# Altium PCB MiniMax 4bit.pcbdoc (part 2 of 3)
Units mil, origin at the board's own origin, x right, y up, seen from the top; angles counter-clockwise.
Board outline 6151.56 x 5816.92 mil, 2 copper layers (Top Layer, Bottom Layer); 181 components, 187 nets, 727 pads, 463 vias.
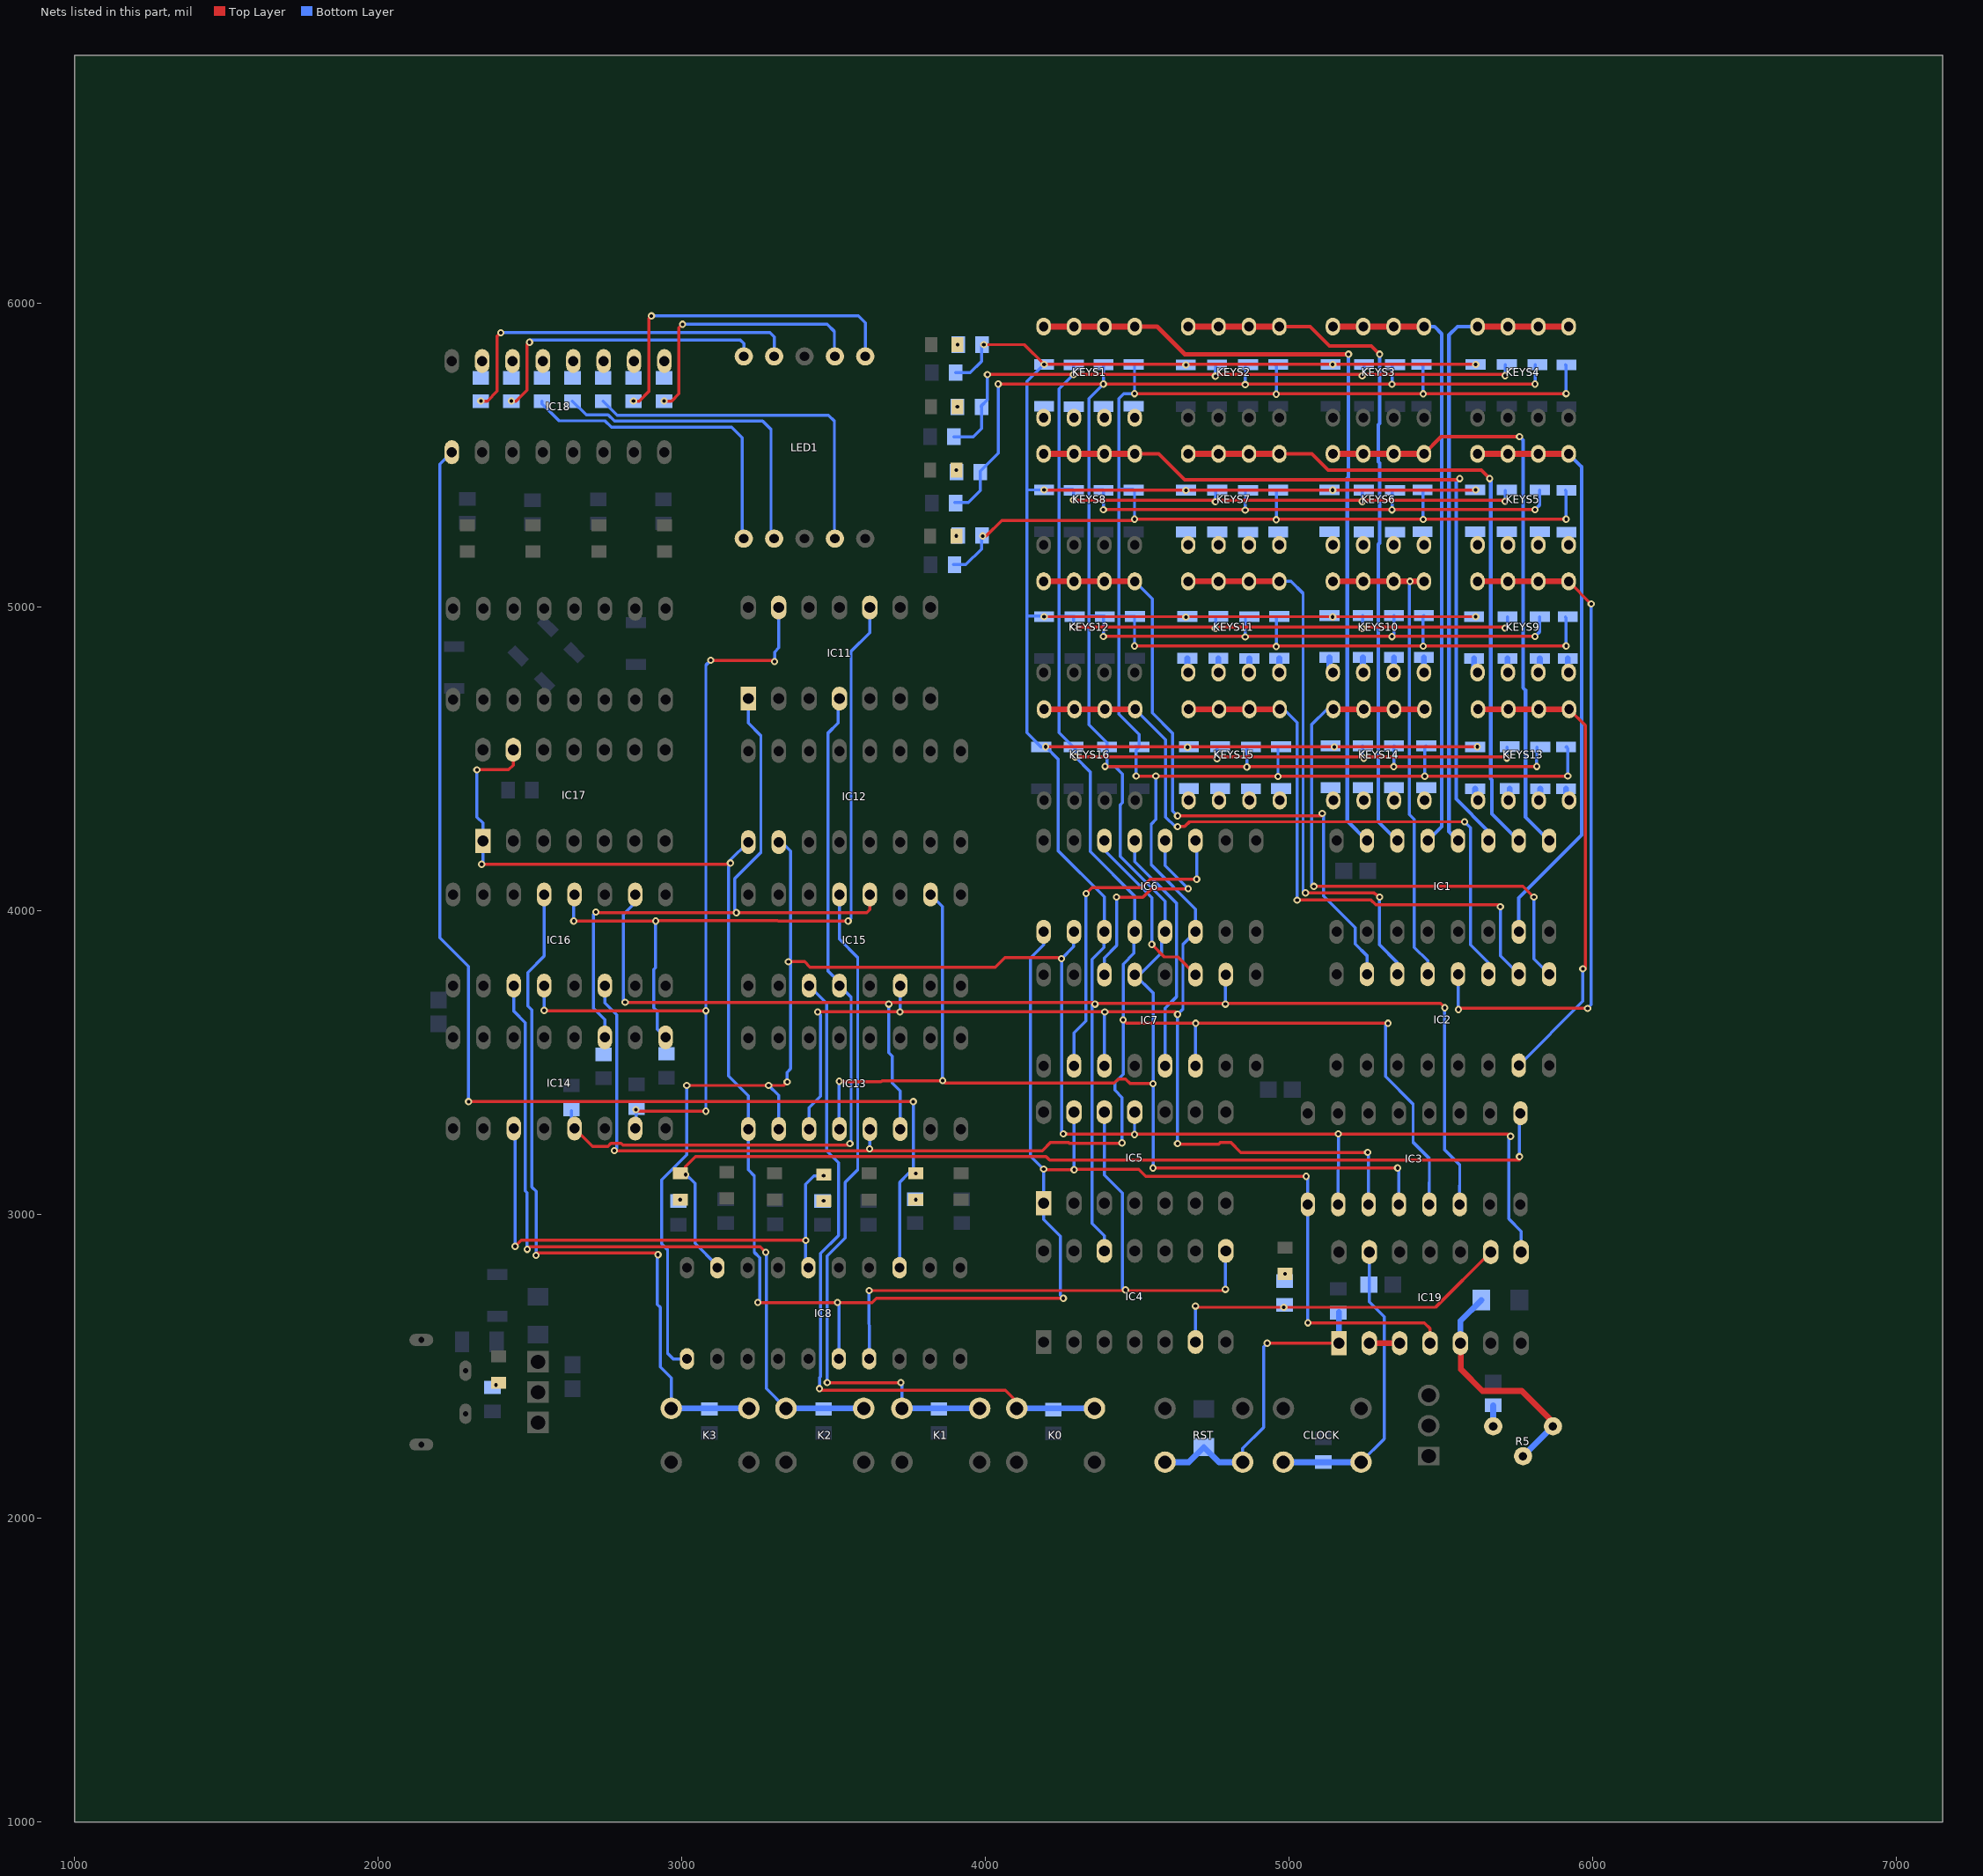
[diagram p2: the nets of this part, all layers, seen from the top]

## Via types
v1: diameter 24, hole 12, Top Layer to Bottom Layer, tented both sides, 306 vias
v2: diameter 27.56, hole 15.75, Top Layer to Bottom Layer, tented both sides, 98 vias
v3: diameter 31.5, hole 15.75, Top Layer to Bottom Layer, tented both sides, 59 vias

## Nets (pads, with @x,y where several pads share a name; then routed paths per layer and width w, separated by ;. In a path a pad name is that pad's centre, name@x,y a point inside that pad or via, vN(x,y) a via of type N, cw(c..) or ccw(c..) an arc to the next point about the centre after c; other vN are vias at no path point) (continued)
IC19_1: C2.2 IC19.1 R8.1 RST.1 RST.2 | length 1060.7
  Top Layer w10: v1(4927.17,2576.81) IC19.1@5163.38,2576.77
  Bottom Layer w10: RST.2@4846.5,2185.02 4846.47,2230.31 4915.37,2299.21 4915.37,2565.01 v1(4927.17,2576.81)
  Bottom Layer w19.68: RST.1@4590.5,2185.02 4668.97,2185.01 C2.2@4718.5,2234.55 4768.07,2185.01 RST.2@4846.5,2185.02 ; IC19.1@5163.38,2576.77 R8.1@5163.37,2679.11
IC19_2: IC19.2 IC19.3 | length 100
  Top Layer w19.68: IC19.2@5263.38,2576.77 IC19.3@5363.38,2576.77
IC19_9: IC4.6 IC19.9 R42.1 | length 1167.5
  Top Layer w10: v1(4690.97,2698.81) 4694.87,2694.91 v1(4981.89,2694.91) ; v1(4981.89,2694.91) 5481.47,2694.91 IC19.9@5663.38,2876.77
  Bottom Layer w10: IC4.6@4690.97,2580.71 v1(4690.97,2698.81)
IC19_13: C1.1 CLOCK.1 CLOCK.2 IC19.13 R9.1 | length 1000.1
  Bottom Layer w10: CLOCK.2@5236.26,2185.02 5312.97,2261.71 5312.97,2663.41 5263.37,2713.01 IC19.13@5263.38,2876.77
  Bottom Layer w19.68: CLOCK.1@4980.26,2185.02 CLOCK.2@5236.26,2185.02
IN0: IC15.3 K0.3 K0.4 R25.2 | length 2338.2
  Top Layer w10: v1(3452.77,2427.21) 3458.77,2421.21 4064.97,2421.21 4102.27,2383.91 K0.4@4102.31,2362.22
  Bottom Layer w10: IC15.3@3418.5,3753.93 3476.37,3696.01 3476.37,3210.61 3515.77,3171.21 3515.77,2931.11 3456.67,2872.01 3456.67,2466.51 3452.77,2462.61 v1(3452.77,2427.21)
  Bottom Layer w19.68: K0.4@4102.31,2362.22 K0.3@4358.31,2362.22
IN1: IC15.13 K1.3 K1.4 R24.2 | length 2258
  Top Layer w10: v1(3478.37,2446.81) v1(3720.47,2446.81)
  Bottom Layer w10: v1(3478.37,2446.81) 3478.37,2864.21 3537.37,2923.21 3537.37,3106.31 3578.77,3147.71 3578.77,3846.41 3518.47,3906.71 IC15.13@3518.5,4053.93 ; v1(3720.47,2446.81) 3724.36,2442.92 K1.4@3724.36,2362.22
  Bottom Layer w19.68: K1.4@3724.36,2362.22 K1.3@3980.36,2362.22
IN2: IC16.3 K2.3 K2.4 R23.2 | length 2479.5
  Top Layer w10: v1(2490.16,2885.82) 2498.03,2893.7 3257.88,2893.7 v1(3275.59,2875.98)
  Bottom Layer w10: IC16.3@2446.06,3753.93 2446.87,3669.31 2484.27,3631.91 2484.27,3078.71 2490.17,3072.81 v1(2490.16,2885.82) ; v1(3275.59,2875.98) 3277.56,2874.02 3277.56,2427.12 K2.4@3342.47,2362.22
  Bottom Layer w19.68: K2.4@3342.47,2362.22 K2.3@3598.47,2362.22
IN3: IC16.13 K3.3 K3.4 R22.2 | length 2418.3
  Top Layer w10: v1(2519.68,2866.14) 2519.67,2874.01 2921.27,2874.01 v1(2921.26,2868.11)
  Bottom Layer w10: v1(2519.68,2866.14) 2519.67,3076.81 2505.87,3090.51 2505.87,3673.21 2492.17,3687.01 2492.17,3797.21 2546.07,3851.21 IC16.13@2546.06,4053.93 ; v1(2921.26,2868.11) 2919.27,2866.11 2919.27,2704.71 2929.17,2694.91 2929.17,2498.01 2964.47,2462.61 K3.4@2964.52,2362.22
  Bottom Layer w19.68: K3.4@2964.52,2362.22 K3.3@3220.52,2362.22
KEYS1_1: D1.1 KEYS1.1
KEYS1_2: D2.1 KEYS1.2
KEYS1_3: D3.1 KEYS1.3
KEYS1_4: D4.1 KEYS1.4
KEYS1_8: IC1.15 KEYS1.5 KEYS1.6 KEYS1.7 KEYS1.8 | length 2676.9
  Top Layer w14.05: KEYS1.5@4491.08,5923.61 4564.57,5923.61 4655.47,5832.71 v1(5194.87,5832.71)
  Top Layer w19.68: KEYS1.8@4191.08,5923.61 KEYS1.5@4491.08,5923.61
  Bottom Layer w12.01: v1@5190.97,5836.61 v1(5194.87,5832.71) 5194.87,5427.11 5190.97,5423.21 5190.97,4295.61 IC1.15@5255.51,4231.1
KEYS2_8: IC1.14 KEYS2.5 KEYS2.6 KEYS2.7 KEYS2.8 | length 2300.3
  Top Layer w12.01: KEYS2.5@4966.97,5923.61 5068.47,5923.61 5131.87,5860.21 5269.67,5860.21 v1@5297.27,5832.71
  Top Layer w19.68: KEYS2.8@4666.97,5923.61 KEYS2.5@4966.97,5923.61
  Bottom Layer w12.01: v1@5297.27,5832.71 5297.27,5604.31 5293.27,5600.41 5293.27,5478.31 5297.27,5474.41 5297.27,5210.61 5293.27,5206.71 5293.27,4293.31 IC1.14@5355.5,4231.1
  other v1: 5297.24,5832.67
KEYS3_8: IC1.13 KEYS3.5 KEYS3.6 KEYS3.7 KEYS3.8 | length 2056.4
  Top Layer w19.68: KEYS3.8@5143.3,5923.61 KEYS3.5@5443.3,5923.61
  Bottom Layer w12.01: KEYS3.5@5443.3,5923.61 5477.97,5923.61 5501.97,5899.61 5501.97,4277.51 IC1.13@5455.5,4231.1
KEYS4_8: IC1.12 KEYS4.5 KEYS4.6 KEYS4.7 KEYS4.8 | length 2082.6
  Top Layer w19.68: KEYS4.8@5619.67,5923.61 KEYS4.5@5919.67,5923.61
  Bottom Layer w12.01: IC1.12@5555.5,4231.1 5525.57,4261.01 5525.57,5895.61 5553.57,5923.61 KEYS4.8@5619.67,5923.61
KEYS5_1: D17.1 KEYS5.1
KEYS5_2: D18.1 KEYS5.2
KEYS5_3: D19.1 KEYS5.3
KEYS5_4: D20.1 KEYS5.4
KEYS5_8: IC1.7 KEYS5.5 KEYS5.6 KEYS5.7 KEYS5.8 | length 1977.2
  Top Layer w19.68: KEYS5.8@5619.67,5504.72 KEYS5.5@5919.67,5504.72
  Bottom Layer w12.01: IC1.7@5755.5,3931.1 5755.47,4042.91 5962.57,4250.01 5962.57,5461.81 KEYS5.5@5919.67,5504.72
KEYS6_1: D21.1 KEYS6.1
KEYS6_2: D22.1 KEYS6.2
KEYS6_3: D23.1 KEYS6.3
KEYS6_4: D24.1 KEYS6.4
KEYS6_8: IC1.9 KEYS6.5 KEYS6.6 KEYS6.7 KEYS6.8 | length 2008.2
  Top Layer w12.01: KEYS6.5@5443.3,5504.72 5499.57,5561.01 v1(5757.87,5561.01)
  Top Layer w19.68: KEYS6.8@5143.3,5504.72 KEYS6.5@5443.3,5504.72
  Bottom Layer w12.01: v1(5757.87,5561.01) 5769.67,5549.21 5769.67,4734.31 5777.57,4726.41 5777.57,4309.01 IC1.9@5855.5,4231.1
KEYS7_1: D25.1 KEYS7.1
KEYS7_2: D26.1 KEYS7.2
KEYS7_3: D27.1 KEYS7.3
KEYS7_4: D28.1 KEYS7.4
KEYS7_8: IC1.10 KEYS7.5 KEYS7.6 KEYS7.7 KEYS7.8 | length 2258.1
  Top Layer w12.01: KEYS7.5@4966.97,5504.71 5073.97,5504.71 5127.97,5450.81 5631.87,5450.81 v1@5659.47,5423.21
  Top Layer w19.68: KEYS7.8@4666.97,5504.71 KEYS7.5@4966.97,5504.71
  Bottom Layer w12.01: v1@5659.47,5423.21 5663.37,5419.31 5663.37,4435.01 5667.27,4431.11 5667.27,4319.31 IC1.10@5755.5,4231.1
  other v1: 5659.44,5423.22
KEYS8_8: IC1.11 KEYS8.5 KEYS8.6 KEYS8.7 KEYS8.8 | length 2647.9
  Top Layer w12.01: KEYS8.5@4491.08,5504.72 4570.07,5504.71 4655.47,5419.31 5557.07,5419.31 v1(5561.02,5423.22)
  Top Layer w19.68: KEYS8.8@4191.08,5504.72 KEYS8.5@4491.08,5504.72
  Bottom Layer w12.01: v1(5561.02,5423.22) 5549.17,5411.41 5549.17,4368.11 5655.47,4261.81 IC1.11@5655.5,4231.1
KEYS9_1: D33.1 KEYS9.1 | length 50.5
  Bottom Layer w19.68: D33.1@5608.26,4830.7 5608.27,4796.31 KEYS9.1@5619.67,4784.87
KEYS9_2: D34.1 KEYS9.2 | length 46.3
  Bottom Layer w19.68: D34.1@5718.49,4830.7 5718.47,4786.01 KEYS9.2@5719.67,4784.87
KEYS9_3: D35.1 KEYS9.3 | length 47.9
  Bottom Layer w19.68: KEYS9.3@5819.67,4784.87 5824.77,4790.01 D35.1@5824.79,4830.7
KEYS9_4: D36.1 KEYS9.4 | length 47
  Bottom Layer w19.68: D36.1@5916.8,4830.68 5916.77,4787.71 KEYS9.4@5919.67,4784.87
KEYS9_8: IC2.12 KEYS9.5 KEYS9.6 KEYS9.7 KEYS9.8 | length 2285.1
  Top Layer w10: v1(5557.08,3675.19) 5561.02,3679.13 v1(5982.27,3679.13) ; KEYS9.5@5919.67,5084.87 v1@5994.07,5010.41
  Top Layer w19.68: KEYS9.8@5619.67,5084.87 KEYS9.5@5919.67,5084.87
  Bottom Layer w10: IC2.12@5555.5,3791.28 5555.47,3676.71 v1(5557.08,3675.19) ; v1(5982.27,3679.13) 5994.07,3690.93 v1@5994.07,5010.41
  other v1: 5994.08,5010.45
KEYS10_1: D37.1 KEYS10.1 | length 54.4
  Bottom Layer w19.68: D37.1@5131.88,4834.64 5131.87,4796.31 KEYS10.1@5143.3,4784.87
KEYS10_2: D38.1 KEYS10.2 | length 50.2
  Bottom Layer w19.68: D38.1@5242.17,4834.61 5242.17,4786.01 KEYS10.2@5243.3,4784.87
KEYS10_3: D39.1 KEYS10.3 | length 50.2
  Bottom Layer w19.68: KEYS10.3@5343.3,4784.87 5344.47,4786.01 D39.1@5344.48,4834.64
KEYS10_4: D40.1 KEYS10.4 | length 49.9
  Bottom Layer w19.68: D40.1@5442.9,4834.64 5442.87,4785.31 KEYS10.4@5443.3,4784.87
KEYS10_8: IC2.13 KEYS10.5 KEYS10.6 KEYS10.7 KEYS10.8 | length 1663.5
  Top Layer w19.68: KEYS10.8@5143.3,5084.87 5397.67,5084.91 KEYS10.5@5443.3,5084.87
  Bottom Layer w10: KEYS10.5@5443.3,5084.87 5399.87,5084.91 5395.67,5080.71 5395.67,4903.51 5395.67,4316.91 5411.37,4301.21 5411.37,3879.91 5455.47,3835.81 IC2.13@5455.5,3791.28
  other v1: 5397.65,5084.87
KEYS11_1: D41.1 KEYS11.1 | length 47.8
  Bottom Layer w19.68: D41.1@4664.08,4831.52 4664.07,4787.71 KEYS11.1@4666.97,4784.91
KEYS11_2: D42.1 KEYS11.2 | length 46.6
  Bottom Layer w19.68: D42.1@4766.47,4831.51 KEYS11.2@4766.97,4784.91
KEYS11_3: D43.1 KEYS11.3 | length 46.5
  Bottom Layer w19.68: KEYS11.3@4866.97,4784.91 4868.07,4786.11 D43.1@4868.11,4831
KEYS11_4: D44.1 KEYS11.4 | length 46.6
  Bottom Layer w19.68: KEYS11.4@4966.97,4784.91 D44.1@4967.27,4831.51
KEYS11_8: IC2.14 KEYS11.5 KEYS11.6 KEYS11.7 KEYS11.8 | length 1915.7
  Top Layer w10: v1@5053.17,4059.01 5279.07,4059.01 v1@5297.27,4045.31
  Top Layer w19.68: KEYS11.8@4666.97,5084.91 KEYS11.5@4966.97,5084.91
  Bottom Layer w10: KEYS11.5@4966.97,5084.91 5005.67,5084.91 5045.27,5045.31 5045.27,4059.01 v1@5053.17,4059.01 ; v1@5297.27,4045.31 5297.27,3887.71 5355.47,3829.51 IC2.14@5355.5,3791.28
  other v1: 5297.24,4045.27 5053.14,4059.05
KEYS12_8: IC2.15 KEYS12.5 KEYS12.6 KEYS12.7 KEYS12.8 | length 2207.3
  Top Layer w10: v1(4631.87,4313.01) 5108.26,4313.01 v1(5108.26,4320.86)
  Top Layer w19.68: KEYS12.8@4191.08,5084.87 KEYS12.5@4491.08,5084.87
  Bottom Layer w10: KEYS12.5@4491.08,5084.87 4549.17,5026.71 4549.17,4651.61 4616.17,4584.61 4616.17,4328.71 v1(4631.87,4313.01) ; v1(5108.26,4320.86) 5112.17,4320.91 5112.17,4049.21 5216.57,3944.91 5216.57,3891.71 5255.47,3852.81 IC2.15@5255.51,3791.28
KEYS13_1: D49.1 KEYS13.1 | length 41.6
  Bottom Layer w19.68: D49.1@5612.2,4401.57 5612.17,4372.71 KEYS13.1@5621.17,4363.71
KEYS13_2: D50.1 KEYS13.2 | length 40.5
  Bottom Layer w19.68: KEYS13.2@5721.17,4363.71 5725.37,4367.91 D50.1@5725.37,4402.51
KEYS13_3: D51.1 KEYS13.3 | length 40.4
  Bottom Layer w19.68: KEYS13.3@5821.17,4363.71 5826.27,4368.91 D51.1@5826.26,4402.01
KEYS13_4: D52.1 KEYS13.4 | length 42
  Bottom Layer w19.68: D52.1@5911.41,4401.57 5911.37,4373.41 KEYS13.4@5921.17,4363.71
KEYS13_8: IC2.7 KEYS13.5 KEYS13.6 KEYS13.7 KEYS13.8 | length 1589.7
  Top Layer w10: KEYS13.5@5921.17,4663.71 5974.37,4610.51 5974.37,3809.01 v1@5966.57,3809.01
  Top Layer w19.68: KEYS13.8@5621.17,4663.71 KEYS13.5@5921.17,4663.71
  Bottom Layer w10: IC2.7@5755.5,3491.28 5966.57,3702.41 v1@5966.57,3809.01
  other v1: 5966.53,3809.05
KEYS14_1: D53.1 KEYS14.1
KEYS14_2: D54.1 KEYS14.2
KEYS14_3: D55.1 KEYS14.3
KEYS14_4: D56.1 KEYS14.4
KEYS14_8: IC2.9 KEYS14.5 KEYS14.6 KEYS14.7 KEYS14.8 | length 1941.9
  Top Layer w10: v1(5080.7,4080.7) 5769.67,4080.71 v1(5805.11,4045.27)
  Top Layer w19.68: KEYS14.8@5144.75,4663.74 KEYS14.5@5444.75,4663.74
  Bottom Layer w10: v1(5080.7,4080.7) 5072.87,4088.61 5072.87,4612.21 5124.37,4663.71 KEYS14.8@5144.75,4663.74 ; v1(5805.11,4045.27) 5805.07,3841.71 IC2.9@5855.5,3791.28
KEYS15_1: D57.1 KEYS15.1
KEYS15_2: D58.1 KEYS15.2
KEYS15_3: D59.1 KEYS15.3
KEYS15_4: D60.1 KEYS15.4
KEYS15_8: IC2.10 KEYS15.5 KEYS15.6 KEYS15.7 KEYS15.8 | length 1889.2
  Top Layer w10: v1(5025.58,4035.43) 5269.67,4035.41 5285.47,4019.71 5694.87,4019.71 v1(5694.87,4013.77)
  Top Layer w19.68: KEYS15.8@4668.37,4663.74 KEYS15.5@4968.37,4663.74
  Bottom Layer w10: KEYS15.5@4968.37,4663.74 4981.87,4663.71 5025.57,4620.01 v1(5025.58,4035.43) ; v1(5694.87,4013.77) 5694.87,3851.91 IC2.10@5755.5,3791.28
KEYS16_8: IC2.11 KEYS16.5 KEYS16.6 KEYS16.7 KEYS16.8 | length 2234.5
  Top Layer w10: v1(4631.87,4277.51) 4655.47,4277.51 4671.27,4293.31 v1(5576.76,4293.3)
  Top Layer w19.68: KEYS16.8@4192.57,4663.71 KEYS16.5@4492.57,4663.71
  Bottom Layer w10: KEYS16.5@4492.57,4663.71 4592.47,4563.71 4592.47,4309.01 4623.97,4277.51 v1(4631.87,4277.51) ; v1(5576.76,4293.3) 5596.47,4273.61 5596.47,3887.81 5655.47,3828.71 IC2.11@5655.5,3791.28
MCLK: IC3.2 IC5.11 IC6.2 IC8.1 IC12.2 IC13.2 IC19.8 | length 6106
  Top Layer w10: v1@3015.74,3425.19 v1(3285.43,3425.19) 3334.64,3425.19 v1@3346.45,3437.01 ; v1(3350.37,3832.71) 3403.57,3832.71 3421.27,3814.91 4031.47,3814.91 4062.97,3846.41 4249.97,3846.41 v1(4249.99,3842.51) ; v1(4255.9,3265.74) 5720.47,3265.74 v1(5728.34,3257.87)
  Bottom Layer w10: v1(3015.75,3425.19) 3015.77,3196.81 2933.07,3114.21 2933.07,2903.51 2952.77,2883.81 2952.77,2543.31 2970.87,2525.21 IC8.1@3016.57,2525.21 ; v1@3285.47,3425.21 3318.47,3392.11 IC13.2@3318.5,3281.49 ; IC12.2@3318.5,4226.37 3328.77,4226.41 3358.27,4196.81 3358.27,3480.31 3346.47,3468.51 v1@3346.47,3437.01 ; v1(3350.37,3832.71) v1@3358.27,3832.11 ; v1(4249.99,3842.51) 4289.37,3881.91 4289.37,3929.51 IC6.2@4290.97,3931.11 ; v1(4249.99,3842.51) 4249.99,3271.65 v1(4255.9,3265.74) v1@4255.9,3263.78 ; v1(4490.17,3263.81) IC5.11@4490.97,3337.41 ; IC3.2@5161.02,3033.46 v1(5161.37,3265.71) ; v1@5728.37,3257.91 5722.47,3252.01 5722.47,2986.21 5763.37,2945.31 IC19.8@5763.38,2876.77
  other v1: 3346.45,3437
OUT: IC8.13 IC18.1 OUT.2 | length 4243.8
  Top Layer w10: v1(2297.24,3372.04) v1(3761.81,3372.04)
  Bottom Layer w10: IC18.1@2242.17,5509.81 2202.77,5470.41 2202.77,3911.41 2297.27,3816.91 v1@2297.27,3372.01 ; IC8.13@3716.57,2825.21 3716.57,3106.31 3745.97,3135.81 v1(3769.68,3135.82) ; v1(3761.81,3372.04) 3761.81,3143.69 v1(3769.68,3135.82)
OUT_1: OUT.1 R40.2
  other v1: 3769.68,3049.2
PC_2: PC.2 R35.2
  other v1: 2994.1,3049.21
PCLD: IC3.9 IC8.19 PC.1 | length 3297.3
  Top Layer w10: v1(3011.81,3131.88) 3011.77,3157.51 3045.27,3190.91 4198.87,3190.91 4210.67,3179.11 5757.87,3179.11 v1(5757.87,3190.94)
  Bottom Layer w10: v1(3011.81,3131.88) 3013.67,3131.91 3043.27,3102.31 3043.27,2905.51 3116.57,2832.21 IC8.19@3116.57,2825.21 ; v1(5757.87,3190.94) 5757.87,3330.31 IC3.9@5761.02,3333.46
R5_1: R5.1 R11.1 | length 68.9
  Bottom Layer w19.68: R5.1@5671.25,2303.14 R11.1@5671.25,2372.04
R5_2: C3.2 IC19.5 R5.2 R5.3 | length 785.4
  Top Layer w19.68: IC19.5@5563.38,2576.77 5564.97,2575.21 5564.97,2490.11 5635.77,2419.31 5765.77,2419.31 5868.07,2316.91 R5.3@5868.1,2303.14
  Bottom Layer w19.68: IC19.5@5563.38,2576.77 5563.37,2649.71 C3.2@5632.18,2718.5 ; R5.2@5769.67,2204.72 R5.3@5868.1,2303.14
R15_1: IC18.9 R15.1
R16_1: IC18.10 R16.1
R17_1: IC18.11 R17.1
R18_1: IC18.12 R18.1
R19_1: IC18.13 R19.1
R20_1: IC18.15 R20.1
R21_1: IC18.14 R21.1
REG0: IC11.4 IC14.5 IC15.4 R1.1 | length 2519
  Top Layer w10: IC14.5@2646.06,3283.46 2705.07,3224.41 2755.87,3224.41 2765.77,3234.21 2799.17,3234.21 2805.07,3228.31 3547.27,3228.31 v1@3553.17,3234.21
  Bottom Layer w10: R1.1@2635.87,3341.91 2635.87,3293.71 IC14.5@2646.06,3283.46 ; IC11.4@3518.5,4698.81 3513.77,4694.11 3513.77,4618.11 3480.27,4584.61 3480.27,3803.11 3518.47,3765.01 IC15.4@3518.5,3753.93 3557.07,3715.31 3557.07,3238.21 3553.17,3234.21 v1@3551.17,3234.21
  other v1: 3553.15,3234.25
REG1: IC11.1 IC14.11 IC15.12 R2.1 | length 2151.5
  Top Layer w10: v1(2716.53,3996.06) 2718.5,3994.09 v1(3179.13,3994.09) 3608.27,3994.11 3618.47,4004.31 IC15.12@3618.5,4053.93
  Bottom Layer w10: v1@2716.57,3996.01 2708.67,3988.21 2708.67,3679.11 2746.07,3641.71 IC14.11@2746.06,3583.46 ; v1@3179.17,3994.11 3173.27,3994.11 3173.27,4106.31 3259.87,4192.91 3259.87,4576.81 3218.47,4618.11 IC11.1@3218.5,4698.81
REG2: IC11.13 IC14.7 IC16.4 R3.1 | length 2797.1
  Top Layer w10: v1(2546.07,3672.42) 2547.23,3671.25 v1(3078.74,3671.25) ; v1(2848.43,3345.81) 2853.69,3340.55 v1(3078.74,3340.55) ; v1(3094.49,4824.79) 3301.18,4824.8 v1(3305.11,4820.86)
  Bottom Layer w10: v1(2546.07,3672.42) IC16.4@2546.06,3753.93 ; IC14.7@2846.06,3283.46 2848.47,3285.81 R3.1@2848.47,3345.81 ; v1(3078.74,3340.55) 3078.74,4809.05 v1(3094.49,4824.79) ; v1(3305.11,4820.86) 3305.07,4852.31 3318.87,4866.11 IC11.13@3318.5,4998.81
REG3: IC11.10 IC14.9 IC16.12 R4.1 | length 2456.8
  Top Layer w10: v1(2643.7,3966.53) v1(2913.38,3966.53) 2915.35,3968.5 3314.96,3968.5 3316.93,3966.53 v1(3547.24,3966.53)
  Bottom Layer w10: v1(2643.7,3966.53) 2643.67,4051.51 IC16.12@2646.06,4053.93 ; v1(2913.38,3966.53) 2913.37,3813.01 2907.47,3807.11 2907.47,3681.11 2919.27,3669.31 2919.27,3610.21 IC14.9@2946.06,3583.46 ; v1@3547.27,3966.51 3557.07,3976.41 3557.07,4854.31 3618.47,4915.71 IC11.10@3618.5,4998.81
REG_2: R38.2 REG.2
  other v1: 3466.54,3045.27
REGWR: IC8.16 IC14.3 REG.1 | length 1704
  Top Layer w10: v1(2450.79,2895.66) 2470.47,2915.35 v1(3407.48,2915.35)
  Bottom Layer w10: IC14.3@2446.06,3283.46 2450.77,3278.71 v1(2450.79,2895.66) ; IC8.16@3416.57,2825.21 3407.47,2834.31 3407.47,3100.41 3435.07,3127.91 v1@3466.57,3127.91
  other v1: 3466.53,3127.95
ROM0: D4.2 D5.2 D9.2 D13.2 D20.2 D24.2 D28.2 D29.2 D36.2 D40.2 D44.2 D45.2 D52.2 D56.2 D60.2 D61.2 IC3.3 IC6.6 IC7.3 IC13.3 IC15.6 R13.1 R27.2 | length 13283.2
  Top Layer w10: v1(3446.85,3667.32) 3470.47,3667.32 v1(3718.06,3667.32) v1(4392.29,3667.32) 4623.96,3667.32 v1(4631.87,3659.41) ; v1(3990.17,5234.21) 4001.97,5234.21 4053.17,5285.41 4486.17,5285.41 v1@4490.17,5289.31 ; v1@4490.15,4872.04 v1(5911.41,4872.04) ; v1@4490.15,5289.36 v1(5911.41,5289.36) ; v1@4490.15,5702.75 v1@5911.41,5702.75 ; v1(4495.54,4443.89) v1(4560.59,4443.88) v1(5916.8,4443.89) ; v1(4631.87,3234.21) 4633.8,3232.28 4767.71,3232.28 4773.62,3238.19 4807.08,3238.19 4840.55,3204.72 v1(5257.87,3204.72)
  Bottom Layer w10: IC13.3@3418.5,3281.49 3418.47,3351.51 3456.67,3389.71 3456.67,3657.51 v1@3446.87,3667.31 ; v1(3718.06,3667.32) IC15.6@3718.5,3753.93 ; R13.1@3894.37,5139.71 3935.07,5139.71 3986.17,5190.91 R27.2@3987.07,5239.01 ; IC7.3@4390.97,3490.11 4390.97,3666.01 v1(4392.29,3667.32) ; 4438.97,4970.21 D45.2@4491.6,4969.32 ; 4438.97,5387.41 4485.47,5387.41 D29.2@4487.67,5385.24 4490.17,5382.71 v1@4490.17,5289.31 ; D45.2@4487.67,4967.91 4490.17,4965.41 v1(4490.15,4872.04) ; D4.2@4487.67,5798.62 4490.17,5796.11 4490.17,5702.71 4454.67,5702.71 4438.97,5687.01 4438.97,4647.61 4505.87,4580.71 D61.2@4505.87,4539.31 ; D61.2@4493.07,4539.71 4505.47,4539.71 D61.2@4505.87,4539.31 ; v1@4495.57,4443.91 4495.57,4529.01 D61.2@4505.87,4539.31 ; v1(4560.59,4443.88) 4560.57,4300.71 4545.27,4285.41 4545.27,4151.61 4690.97,4005.91 4690.97,3931.11 4649.57,3889.71 4649.57,3677.11 v1(4631.87,3659.41) v1(4631.87,3234.21) ; D44.2@4954.67,4966.31 4957.17,4963.81 v1@4957.17,4870.51 ; D28.2@4954.67,5383.61 4957.17,5381.21 v1@4957.17,5287.81 ; D5.2@4954.67,5797.01 4957.17,5794.61 v1@4957.17,5701.21 ; D60.2@4960.07,4538.21 4962.57,4535.71 v1@4962.57,4442.31 ; v1(5257.87,3204.72) 5260.97,3201.61 IC3.3@5261.02,3033.46 ; D40.2@5438.07,4967.31 5438.07,4967.61 D40.2@5442.9,4972.44 5440.57,4970.11 v1(5440.57,4871.48) ; D24.2@5438.07,5384.71 5438.07,5384.91 D24.2@5438.97,5385.82 5440.57,5384.21 v1(5440.57,5288.8) ; D9.2@5438.07,5798.11 5436.17,5798.11 5435.07,5799.21 5440.57,5793.71 v1(5440.57,5702.19) ; D56.2@5443.47,4539.21 5446.67,4539.21 D56.2@5450.78,4543.3 5445.97,4538.51 v1(5445.96,4443.33) ; D36.2@5908.97,4967.91 5911.37,4965.41 v1(5911.41,4872.04) ; D20.2@5908.97,5385.21 5911.37,5382.71 v1@5911.37,5289.31 ; D13.2@5908.97,5798.61 5911.37,5796.11 v1@5911.37,5702.71 ; D52.2@5914.27,4539.71 5911.77,4539.71 5911.37,4539.31 5916.77,4534.01 v1(5916.8,4443.89)
  other v1: 4962.52,4442.32 4957.13,4870.47 4957.13,5287.79 4490.15,5289.36 4957.13,5701.18 4490.15,5702.75 5911.41,5702.75
ROM0_2: R27.1 ROM0.2
  other v1: 3903.54,5234.25
ROM1: D3.2 D6.2 D10.2 D14.2 D19.2 D23.2 D27.2 D30.2 D35.2 D39.2 D43.2 D46.2 D51.2 D55.2 D59.2 D62.2 IC3.4 IC6.5 IC7.13 IC13.4 IC15.10 R10.1 R28.2 | length 13170.1
  Top Layer w10: v1(3517.71,3438.97) 3519.68,3437 3655.51,3437 3659.44,3440.94 v1(3858.26,3440.94) ; v1(3858.26,3440.94) 3866.17,3433.11 4423.27,3433.11 4436.97,3446.81 4460.67,3446.81 4476.37,3431.11 v1(4551.17,3431.11) ; v1(4041.37,5734.21) v1(4387.77,5734.21) v1(5809.03,5734.21) ; v1(4387.77,4903.5) v1(5809.03,4903.5) ; v1(4387.77,5320.82) v1(5809.03,5320.82) ; v1(4393.16,4475.35) v1(5814.42,4475.35) ; v1(4551.18,3153.54) v1(5356.29,3153.54)
  Bottom Layer w10: v1(3517.71,3438.97) 3517.67,3282.31 IC13.4@3518.5,3281.49 ; IC15.10@3818.5,4053.93 3858.27,4014.11 v1(3858.26,3440.94) ; R10.1@3898.27,5344.51 3942.87,5344.51 3982.27,5383.81 3982.67,5447.61 4041.37,5506.31 v1(4041.37,5734.21) ; 4340.57,4970.71 4390.37,4970.71 D46.2@4392.27,4968.8 ; 4340.57,5386.01 4386.97,5386.01 4388.37,5384.71 v1(4387.77,5320.82) ; v1(4387.77,4903.5) D46.2@4388.37,4967.41 ; D3.2@4388.37,5798.11 v1(4387.77,5734.21) 4340.57,5687.01 4340.57,4612.21 4399.57,4553.11 4399.57,4539.31 4399.57,4481.81 v1(4393.16,4475.35) ; v1@4393.17,4475.31 4427.17,4474.41 4450.77,4450.81 4450.77,4356.31 4442.87,4348.41 4442.87,4179.11 4590.97,4031.11 4590.97,3931.11 4578.77,3918.91 4578.77,3862.21 4506.67,3790.11 4490.97,3790.11 4551.17,3729.91 v1(4551.18,3153.54) ; v1(4854.75,4901.93) D43.2@4855.37,4965.81 ; v1@4854.77,5319.21 D27.2@4855.37,5383.11 ; v1(4854.75,5732.64) D6.2@4855.37,5796.51 ; v1@4860.17,4473.81 D59.2@4860.77,4537.71 ; v1(5338.19,4902.94) 5344.47,4909.21 D39.2@5344.48,4972.44 ; v1@5338.17,5320.21 D23.2@5338.77,5384.21 ; v1@5338.17,5733.61 D10.2@5338.77,5797.51 ; v1(5343.58,4474.79) 5344.47,4475.71 D55.2@5344.48,4543.3 ; v1(5356.29,3153.54) 5360.97,3148.81 IC3.4@5361.02,3033.46 ; v1@5809.07,4903.51 5824.77,4919.31 D35.2@5824.79,4968.5 ; v1@5809.07,5320.81 5824.77,5336.61 D19.2@5824.79,5385.82 ; v1@5809.07,5734.21 D14.2@5809.67,5798.11 ; v1@5814.47,4475.31 D51.2@5815.07,4539.21
  other v1: 4860.14,4473.78 4854.75,5319.25 5338.19,5320.26 5338.19,5733.65
ROM1_2: R28.1 ROM1.2
  other v1: 3903.54,5450.78
ROM2: D2.2 D7.2 D11.2 D15.2 D18.2 D22.2 D26.2 D31.2 D34.2 D38.2 D42.2 D47.2 D50.2 D54.2 D58.2 D63.2 IC3.5 IC6.4 IC7.6 IC13.5 IC16.6 R7.1 R29.2 | length 13636
  Top Layer w10: v1(2777.57,3210.61) 4186.97,3210.61 4214.57,3238.21 4271.67,3238.21 4275.57,3234.21 4446.87,3234.21 v1(4448.81,3236.21) ; v1(4005.9,5765.74) v1(4289.36,5765.74) 5706.7,5765.74 v1(5710.63,5761.81) ; v1(4289.36,4935.03) 5706.7,4935.03 v1(5710.63,4931.1) ; v1(4289.36,5352.35) 5706.7,5352.35 v1(5710.63,5348.42) ; v1@4294.75,4506.88 5712.09,4506.88 v1(5716.02,4502.95) ; v1(4452.75,3640.88) 4463.72,3629.92 v1(4691.62,3629.91) v1(5324.8,3629.91)
  Bottom Layer w10: IC16.6@2746.06,3753.93 2746.07,3696.81 2785.47,3657.51 2785.47,3218.51 v1(2777.57,3210.61) ; v1(3618.11,3216.53) 3618.07,3281.11 IC13.5@3618.5,3281.49 ; R7.1@3895.66,5561.03 3958.57,5561.01 3986.17,5588.61 3986.17,5659.51 3984.57,5661.11 4005.87,5682.41 v1(4005.9,5765.74) ; 4242.17,4970.01 4291.77,4970.01 D47.2@4293.3,4968.5 4289.37,4964.51 v1(4289.36,4935.03) ; 4242.17,5387.51 4286.87,5387.51 4290.07,5384.41 4289.37,5383.71 v1@4289.37,5352.31 ; D2.2@4290.07,5797.81 4289.37,5797.11 v1(4289.36,5765.74) 4242.17,5718.51 4242.17,4586.61 D63.2@4289.37,4539.31 ; v1(4448.81,3236.21) 4448.81,3385.82 4425.19,3409.45 4425.19,3435.04 4452.75,3462.59 v1(4452.75,3640.88) 4452.77,3824.81 4488.17,3860.21 4488.17,3928.31 4490.97,3931.11 4490.97,4048.41 4344.47,4194.91 4344.47,4457.11 v1(4294.75,4506.88) ; IC7.6@4690.97,3490.11 v1(4691.62,3629.91) ; v1(4756.35,4929.53) D42.2@4757.07,4965.51 ; v1@4756.37,5346.81 D26.2@4757.07,5382.81 ; v1(4756.35,5760.24) D7.2@4757.07,5796.21 ; v1@4761.77,4501.41 D58.2@4762.47,4537.41 ; v1(5239.79,4930.54) 5242.17,4932.91 D38.2@5242.17,4972.41 ; v1@5239.77,5347.81 D22.2@5240.47,5383.91 ; v1@5239.77,5761.21 5246.07,5767.51 D11.2@5246.06,5799.2 ; D54.2@5242.17,4543.31 5242.17,4505.41 v1(5245.18,4502.39) ; v1(5324.8,3629.91) 5316.97,3629.91 5316.97,3454.71 5407.47,3364.21 5407.47,3238.21 5461.07,3184.61 IC3.5@5461.02,3033.46 ; v1@5710.67,4931.11 5718.47,4939.01 D34.2@5718.49,4968.5 ; v1@5710.67,5348.41 D18.2@5711.37,5384.41 ; v1@5710.67,5761.81 D15.2@5711.37,5797.81 ; v1@5716.07,4502.91 D50.2@5716.77,4538.91 ; D63.2@4289.37,4539.31 D63.2@4294.77,4534.01 ; D63.2@4289.37,4539.31 D63.2@4294.77,4534.01 ; v1(4294.75,4506.88) D63.2@4294.77,4534.01 ; v1(4294.75,4506.88) D63.2@4294.77,4534.01
  other v1: 4761.74,4501.38 4756.35,5346.85 5239.79,5347.86 5239.79,5761.25
ROM2_2: R29.1 ROM2.2
  other v1: 3907.13,5660.26
ROM3: D1.2 D8.2 D12.2 D16.2 D17.2 D21.2 D25.2 D32.2 D33.2 D37.2 D41.2 D48.2 D49.2 D53.2 D57.2 D64.2 IC3.6 IC4.12 IC6.3 IC7.10 IC13.6 IC16.10 R6.1 R30.2 | length 13551.2
  Top Layer w10: v1(2812.99,3698.81) 4354.33,3698.81 v1(4360.23,3692.91) 4362.17,3694.91 5498.07,3694.91 v1(5511.77,3681.11) ; v1(3994.09,5864.16) 4127.41,5864.16 v1(4192.39,5799.18) v1(5613.65,5799.18) ; v1(4192.39,4968.47) v1(5613.65,4968.47) ; v1(4192.39,5385.79) v1(5613.65,5385.79) ; v1(4197.78,4540.32) v1(5619.04,4540.32)
  Bottom Layer w10: v1(2812.99,3698.81) 2807.07,3704.71 2807.07,3988.21 2846.07,4027.21 IC16.10@2846.06,4053.93 ; v1(3681.07,3692.91) 3681.07,3533.41 3692.87,3521.61 3692.87,3433.11 3718.47,3407.51 IC13.6@3718.5,3281.49 ; R6.1@3901.57,5771.61 3948.77,5771.61 3986.17,5809.01 3986.17,5862.71 R30.2@3988.47,5865.01 ; 4135.87,4970.31 4190.57,4970.31 v1(4192.39,4968.47) ; 4135.87,5386.71 v1(4192.39,5385.79) ; D64.2@4183.07,4539.31 4135.87,4586.61 4135.87,5742.61 v1(4192.39,5799.18) ; v1(4197.78,4540.32) 4238.17,4499.91 4238.17,4198.81 4390.97,4046.01 4390.97,3931.11 4389.77,3929.91 4389.77,3879.91 4350.37,3840.51 v1@4350.37,3692.91 ; IC4.12@4390.97,2880.71 4390.97,2929.91 4350.37,2970.51 v1@4350.37,3692.91 ; v1(4789.36,3692.91) 4789.37,3788.61 IC7.10@4790.97,3790.11 ; v1(5511.77,3681.11) 5511.77,3212.61 5561.07,3163.41 IC3.6@5561.02,3033.46 ; v1@4350.37,3692.91 4360.27,3692.91 v1@4350.37,3692.91
  other v1: 4664.76,4538.75 5148.2,4539.76 4659.37,4966.9 5142.81,4967.91 4659.37,5384.22 5142.81,5385.23 4659.37,5797.61 5142.81,5798.62
ROM3_2: R30.1 ROM3.2
  other v1: 3907.48,5864.17
ROM4: IC6.11 IC7.2 | length 1095.5
  Top Layer w10: v1(4330.7,4057.08) 4350.39,4076.77 4513.77,4076.77 4541.33,4104.33 v1(4694.88,4104.32)
  Bottom Layer w10: IC7.2@4290.97,3490.11 4290.97,3598.01 4330.67,3637.81 v1(4330.7,4057.08) ; IC6.11@4690.97,4231.11 4694.87,4227.11 v1(4694.88,4104.32)
ROM5: IC6.12 IC7.14 | length 709.4
  Top Layer w10: v1(4431.1,4045.27) 4517.71,4045.27 4545.27,4072.83 v1(4667.32,4072.83)
  Bottom Layer w10: IC7.14@4390.97,3790.11 4390.67,3845.11 4431.07,3886.01 v1(4431.1,4045.27) ; IC6.12@4590.97,4231.11 4590.97,4149.21 v1@4667.37,4072.81
ROM6: IC6.13 IC7.5 | length 813.1
  Bottom Layer w10: IC6.13@4490.97,4231.11 4490.97,4162.61 4627.97,4025.61 4627.97,3716.51 4590.97,3679.51 IC7.5@4590.97,3490.11
ROM7: IC6.14 IC7.11 | length 591.1
  Top Layer w10: v1@4547.27,3889.71 4588.57,3848.41 4632.67,3848.41 IC7.11@4690.97,3790.11
  Bottom Layer w10: IC6.14@4390.97,4231.11 4390.97,4199.61 4547.27,4043.31 4547.27,3895.71 v1@4547.27,3889.71
  other v1: 4547.24,3889.76
RST: IC3.1 IC5.1 IC5.13 IC6.1 IC8.6 IC12.1 IC13.1 IC17.1 IC17.13 IC19.4 | length 7382.4
  Top Layer w10: v1@2324.77,4464.51 2429.17,4464.51 2444.47,4479.91 IC17.13@2444.49,4530.31 ; v1(2340.57,4153.51) 3155.47,4153.51 v1@3159.47,4157.51 ; v1(3250,2710.63) v1(3512.19,2710.63) 3625.98,2710.63 3639.76,2724.41 v1(4255.9,2724.4) ; v1(4190.97,3149.61) 4192.95,3147.64 v1(4291.33,3147.63) 4293.3,3149.6 4503.93,3149.6 4527.55,3125.98 v1(5055.11,3125.98) ; v1(5061.02,2643.7) 5444.87,2643.71 5463.37,2625.21 IC19.4@5463.38,2576.77
  Bottom Layer w10: v1@2324.77,4464.51 2324.77,4309.01 2344.47,4289.41 IC17.1@2344.49,4230.31 2344.47,4157.41 v1(2340.57,4153.51) ; IC12.1@3218.5,4226.37 3159.47,4167.41 3159.47,4157.51 3153.57,4151.61 3153.57,3456.71 3218.47,3391.71 IC13.1@3218.5,3281.49 3218.47,3147.61 3238.17,3127.91 3238.17,2876.01 3255.87,2858.31 3255.87,2716.51 v1(3250,2710.63) ; v1(3512.19,2710.63) 3516.57,2706.31 IC8.6@3516.57,2525.21 ; IC6.1@4190.97,3931.11 4190.97,3887.81 4147.67,3844.51 4147.67,3192.91 v1(4190.97,3149.61) 4190.97,3037.41 4190.97,2984.21 4246.07,2929.11 4246.07,2734.21 v1(4255.9,2724.4) ; IC5.13@4290.97,3337.41 4291.37,3337.01 v1@4291.37,3147.61 ; v1(5055.11,3125.98) 5060.97,3120.11 v1(5061.02,2643.7)
  other v1: 3159.45,4157.47 2324.8,4464.56
SEGA: LED1.7 R15.2 | length 884.9
  Top Layer w10: v1@2941.07,5678.31 2965.77,5678.31 2990.17,5702.71 2990.17,5919.31 v1(3001.97,5931.09)
  Bottom Layer w10: v1(3001.97,5931.09) 3478.37,5931.11 3501.97,5907.51 3501.97,5827.11 LED1.7@3503.57,5825.61
  other v1: 2941.08,5678.35
SEGB: LED1.6 R16.2 | length 1139.4
  Top Layer w10: v1@2840.57,5678.31 2859.47,5678.31 2891.77,5710.61 2891.77,5950.81 v1@2899.57,5958.61
  Bottom Layer w10: v1@2899.57,5958.61 3580.67,5958.61 3603.57,5935.81 LED1.6@3603.57,5825.61
  other v1: 2840.55,5678.35 2899.6,5958.65
SEGC: LED1.4 R17.2 | length 1176.6
  Bottom Layer w10: R17.2@2740.07,5678.31 2786.47,5631.91 3482.27,5631.91 3501.97,5612.21 3501.97,5227.11 LED1.4@3503.57,5225.61
SEGD: LED1.2 R18.2 | length 1055.9
  Bottom Layer w10: R18.2@2639.47,5678.31 2685.17,5632.71 2757.07,5632.71 2777.57,5612.21 3265.77,5612.21 3293.27,5584.61 3293.27,5235.81 LED1.2@3303.57,5225.61
SEGE: LED1.1 R19.2 | length 1048.6
  Bottom Layer w10: R19.2@2538.97,5678.31 2538.97,5669.71 2595.27,5613.41 2746.77,5613.41 2767.67,5592.51 3163.37,5592.51 3198.77,5557.11 3198.77,5230.31 LED1.1@3203.57,5225.61
SEGF: LED1.9 R20.2 | length 1234.5
  Top Layer w10: v1@2337.97,5678.31 2359.47,5678.31 2391.77,5710.61 2391.77,5891.71 v1@2403.57,5903.51
  Bottom Layer w10: v1@2403.57,5903.51 3289.37,5903.51 3303.57,5889.31 LED1.9@3303.57,5825.61
  other v1: 2337.93,5678.35 2403.54,5903.53
SEGG: LED1.10 R21.2 | length 987.8
  Top Layer w10: v1@2438.47,5678.31 2453.97,5678.31 2490.17,5714.51 2490.17,5864.21 v1@2498.07,5872.01
  Bottom Layer w10: v1@2498.07,5872.01 2498.07,5879.91 3190.97,5879.91 3203.57,5867.31 LED1.10@3203.57,5825.61
  other v1: 2438.46,5678.35 2498.03,5872.04
STATUS: IC4.8 IC5.12 IC8.7 | length 2147.2
  Top Layer w10: v1(3616.17,2750.01) 4785.44,2750.01 v1(4789.36,2753.93)
  Bottom Layer w10: v1(3616.17,2750.01) IC8.7@3616.57,2525.21 ; IC5.12@4390.97,3337.41 4390.97,3130.71 4450.77,3070.91 4450.77,2751.91 v1@4460.57,2751.91 ; v1(4789.36,2753.93) 4789.37,2879.11 IC4.8@4790.97,2880.71
  other v1: 4460.62,2751.96
U1_1: PWR.1 R12.2
  other v1: 2387.79,2438.97
U2_1: CLK.1 R42.2
  other v1: 4986.2,2805.09